# Altium PCB FYP.PcbDoc
Units mm, origin at the board's own origin, x right, y up, seen from the top; angles counter-clockwise.
Board outline 80 x 72.5 mm, 2 copper layers (Top Layer, Bottom Layer), stack 1.1 mm thick; 17 components, 28 nets, 99 pads, 9 vias.
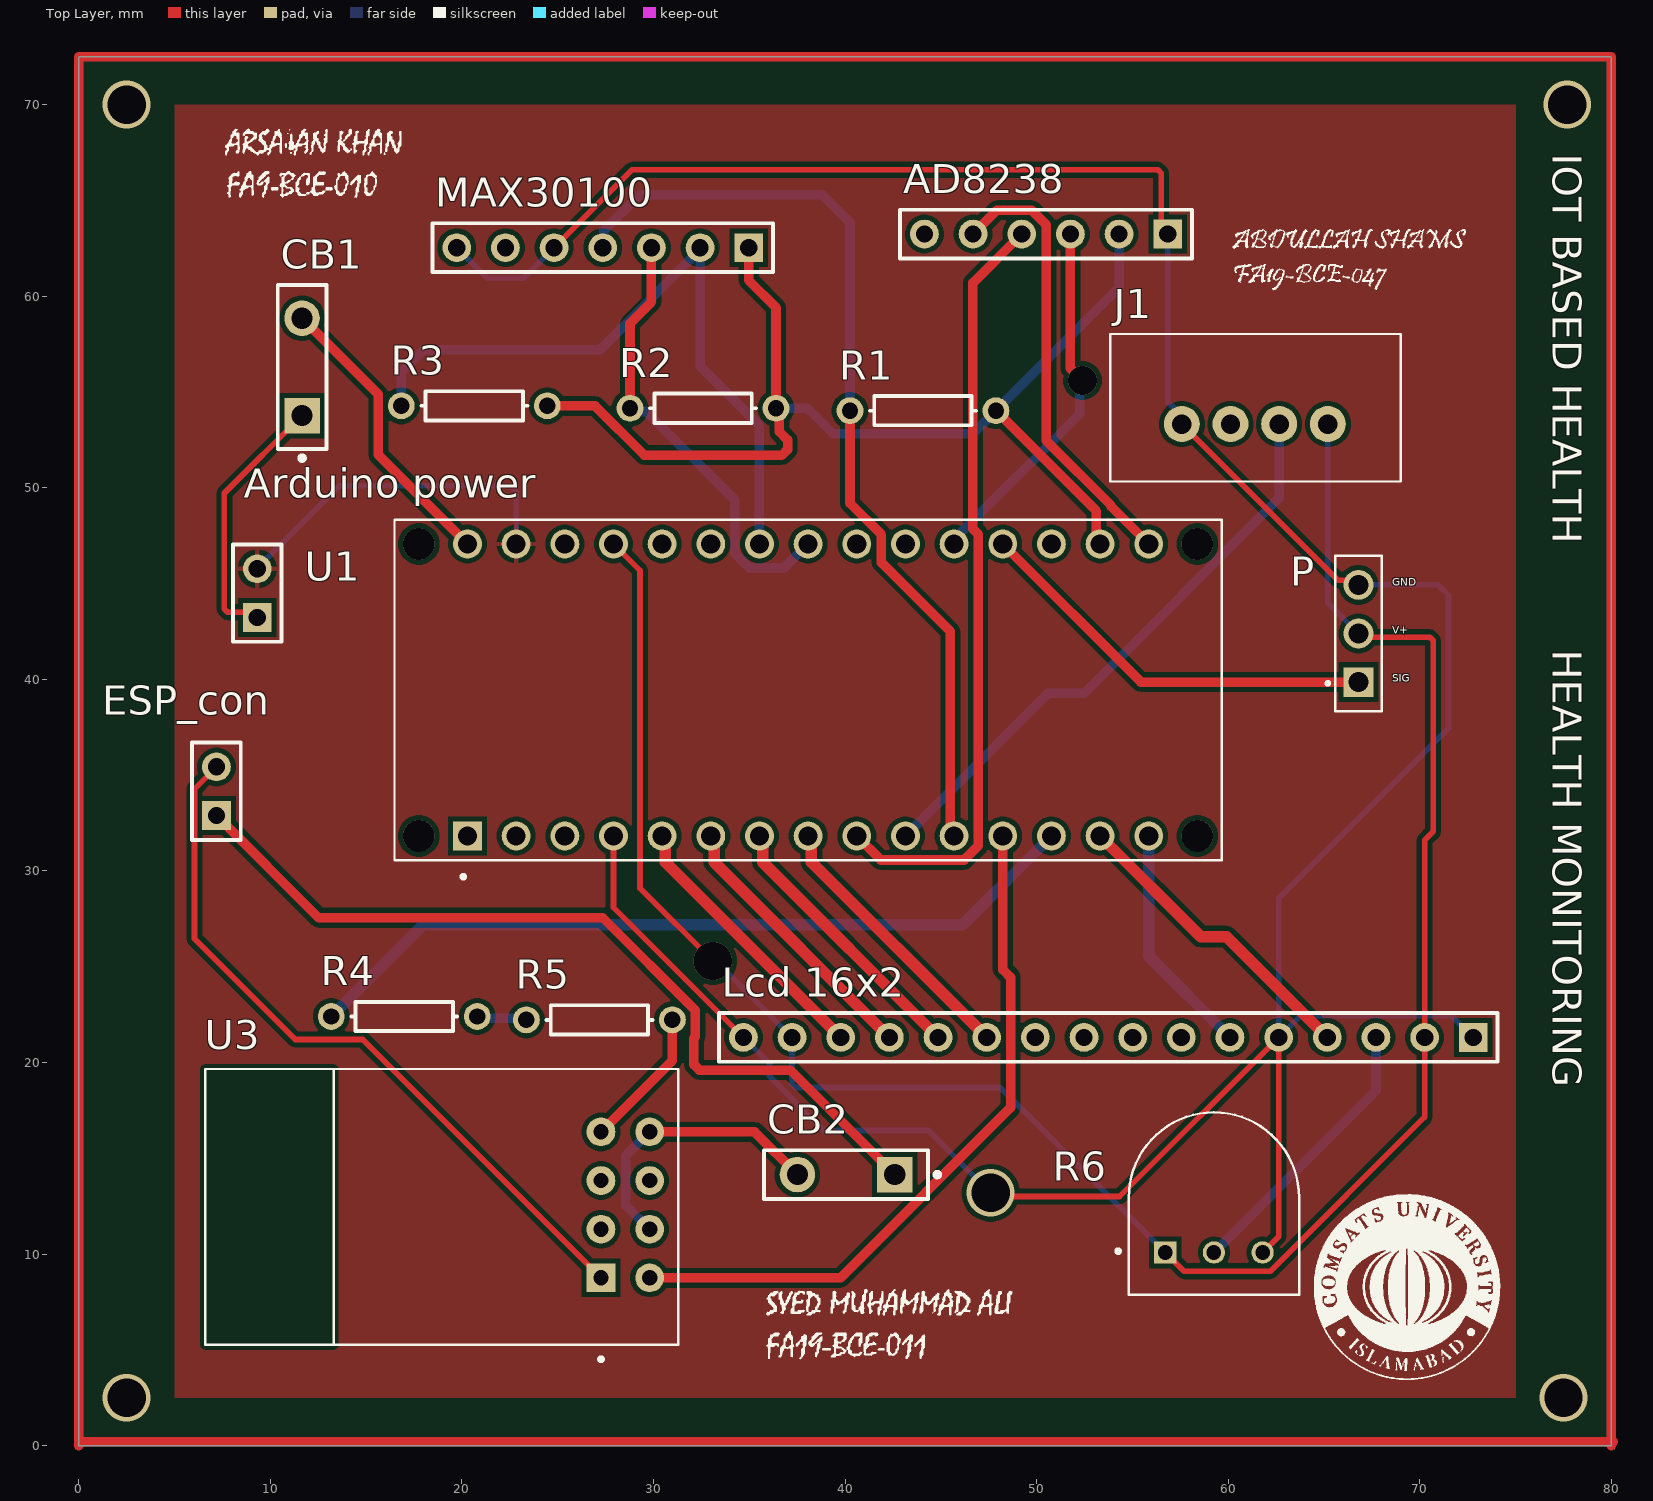
[diagram p0: Top Layer view]
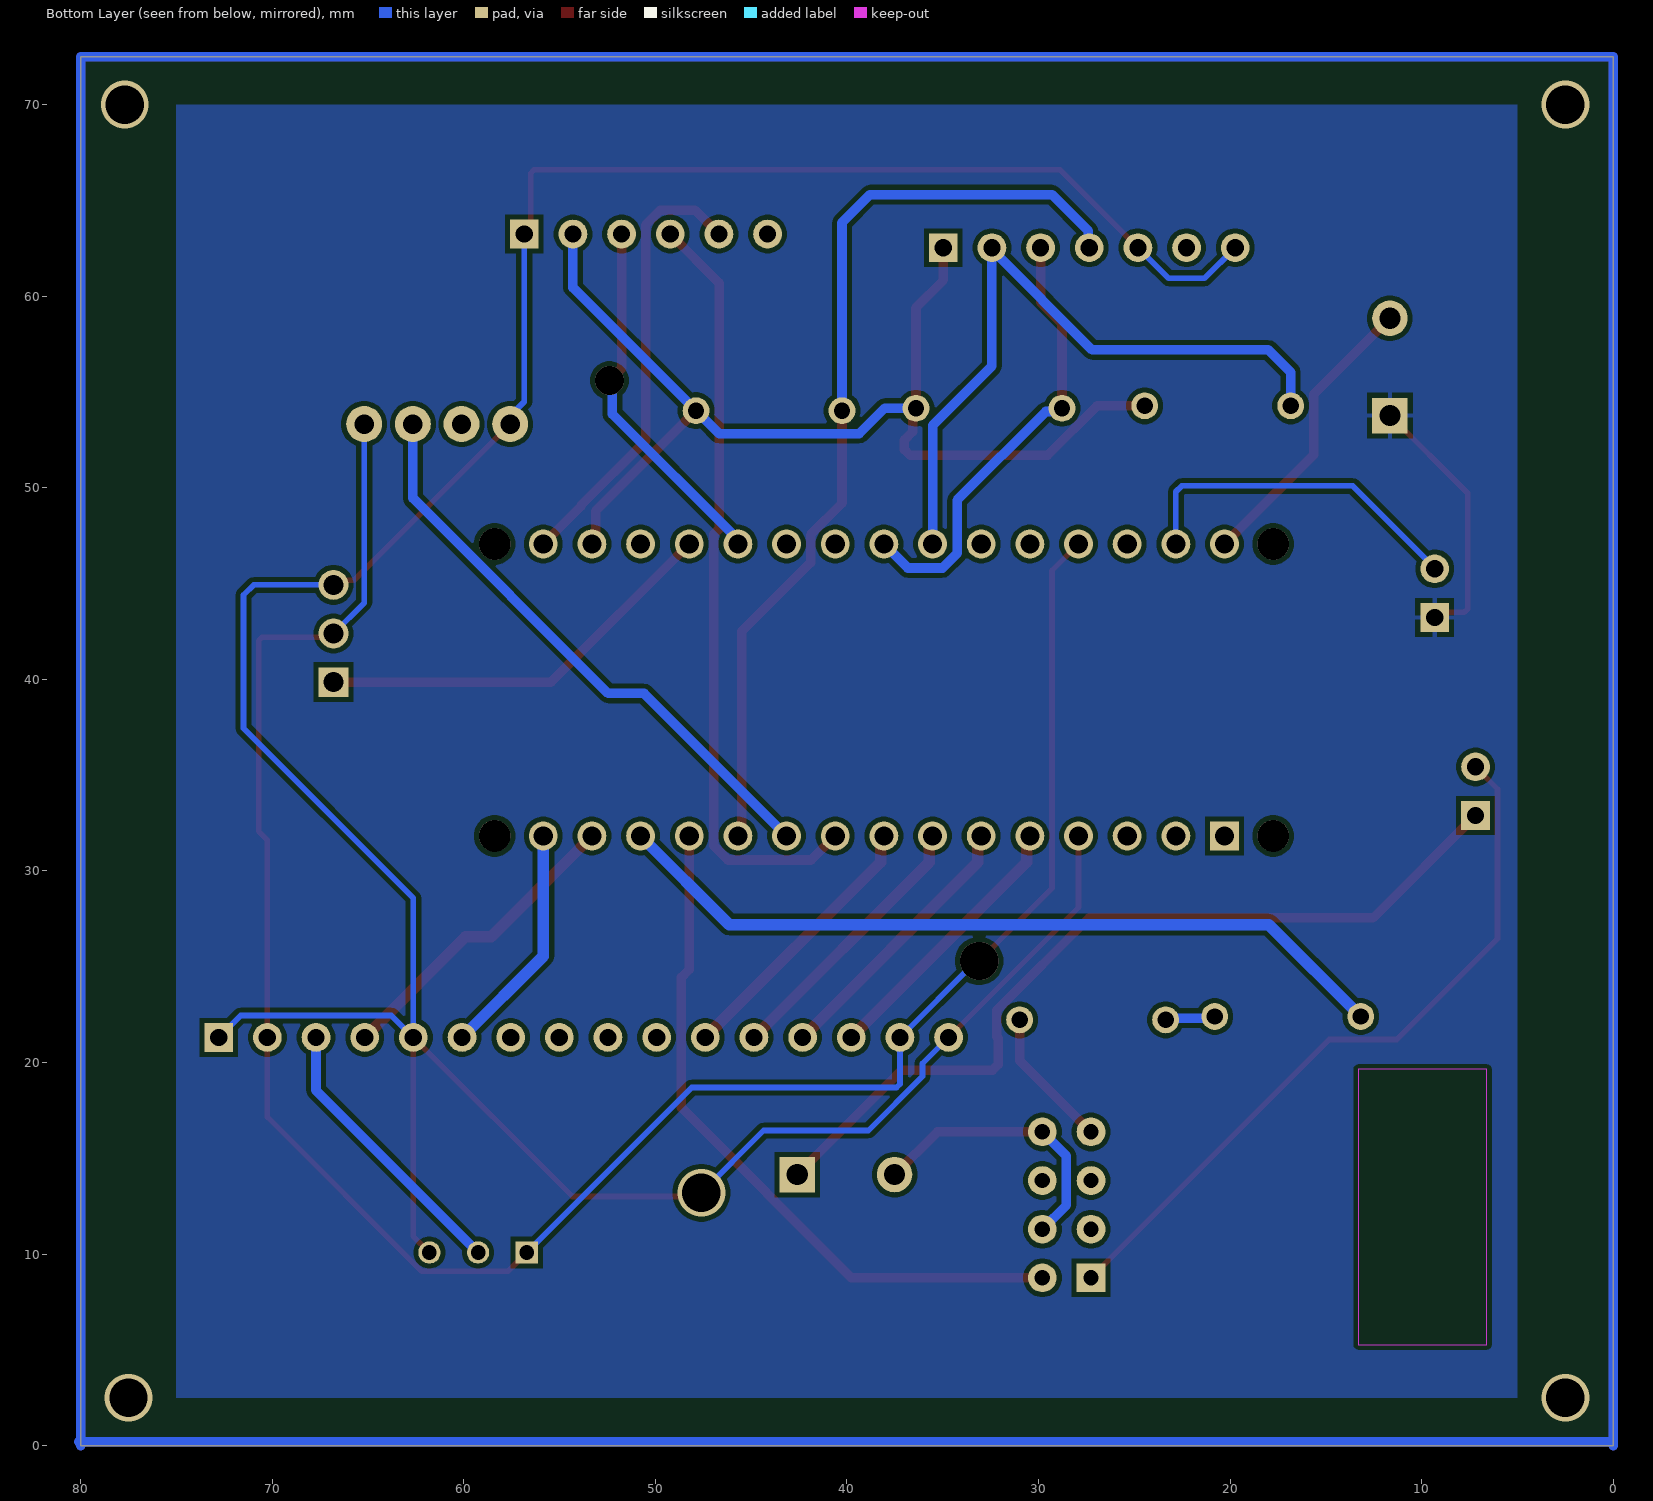
[diagram p1: Bottom Layer view, seen from below]

## Layer stack, top to bottom
Top Solder: solder mask 0.05, Solder Resist, Dk 3.5
Top Layer: signal copper 0.1
Dielectric 1: dielectric 0.9, FR-4, Dk 4.8
Bottom Layer: signal copper 0.1
Bottom Solder: solder mask 0.05, Solder Resist, Dk 3.5

## Board outline
0,0 80,0 80,72.5 0,72.5

## Design rules (kind name [scope] priority, off if disabled: settings)
Clearance [All] p1: gap=0.25 ignorepadtopadclearanceinfootprint=FALSE
PolygonConnect [All] p1: connectstyle=Relief reliefconductorwidth=0.254 reliefentries=4 polygonreliefangle="90 Angle" airgapwidth=0.254
RoutingVias [All] p1: holewidth=0.4 width=0.5 viastyle="Through Hole" minholewidth=0.4 minwidth=0.5 maxholewidth=0.4 maxwidth=0.5
SilkToSolderMaskClearance [IsPad] p1: minsilkscreentomaskgap=0.24 clearancetoexposedcopper=TRUE
SolderMaskExpansion [All] p1: expansion=0.102 istentingtop=FALSE
Width Ard_Pow [(InNet('Arduino Vcc') OR InNet('Ard Gnd') OR InNet('Esp Gnd') OR InNet('Vcc') OR InNet('gnd'))] p1: maxlimit=0.3 minlimit=0.2 preferedwidth=0.3
Width [All] p2: maxlimit=0.6 minlimit=0.2 preferedwidth=0.5
29 further rules are at their usual default settings.

## Components (designator, comment, footprint, x,y, rotation, side; value= is the part's Value field where it differs from the comment)
AD8238 "Header 6" HDR1X6 56.843,63.246 r180 top
"Arduino power" "Header 2" HDR1X2 9.32,43.23 r90 top
CB1 "Circuit Breaker" SPST-2 11.657,56.311 r90 top
CB2 "Circuit Breaker" SPST-2 40.054,14.147 r180 top
ESP_con "Header 2" HDR1X2 7.186,32.893 r90 top
J1 "DHT22" DHT22 61.39,54.178 r180 top
"Lcd 16x2" "Header 16" HDR1X16 72.794,21.31 r180 top
MAX30100 "Header 7" HDR1X7 34.974,62.534 r180 top
P "SEN-11574" XDCR_SEN-11574 66.8,42.392 r0 top
R1 "Res1" AXIAL-0.3 44.067,54.025 r0 top value=4.7K
R2 "Res1" AXIAL-0.3 32.586,54.152 r0 top value=4.7K
R3 "Res1" AXIAL-0.3 20.648,54.279 r0 top value=4.7K
R4 "Res1" AXIAL-0.3 16.991,22.402 r180 top value=1K
R5 "Res1" AXIAL-0.3 27.176,22.225 r180 top value=2.2K
R6 "3352T-1-254LF" TRIM_3352T-1-254LF 59.256,12.953 r0 top
U1 "A000005" MODULE_A000005 38.073,39.446 r90 top
U3 "ESP8266-01/ESP-01" XCVR_ESP8266-01/ESP-01 18.95,12.57 r90 top

## Footprints (in the part's own frame and the unit in brackets; to place one, negate y for a bottom-side part, rotate by r counter-clockwise, add the part's x,y. Pads: shape width x height; smd on the part's side, far side on the other; paste and mask are expansions set on the pad)
AXIAL-0.3 [mm] "Axial Device, Thru-Hole; 2 Leads; 0.3 in Pin Spacing"
  round 1.4 hole 0.85: 1(-3.81,0) 2(3.81,0)
  silkscreen extent -2.77,-0.76 2.77,0.76
DHT22 [mil]
  round 74 hole 40: DATA(-50,33.46) GND(150,33.46) NC(50,33.46) VCC(-150,33.46)
  silkscreen extent -300,-152 297,152
HDR1X2 [mm] "Connector; Header; 2 Position"
  rect 1.5x1.5 hole 0.9: 1(0,0)
  round 1.5 hole 0.9: 2(2.54,0)
  silkscreen extent -1.27,-1.27 3.81,1.27
HDR1X6 [mm] "Connector; Header; 6 Position"
  rect 1.5x1.5 hole 0.9: 1(0,0)
  round 1.5 hole 0.9: 2(2.54,0) 3(5.08,0) 4(7.62,0) 5(10.16,0) 6(12.7,0)
  silkscreen extent -1.27,-1.27 13.97,1.27
HDR1X7 [mm] "Connector; Header; 7 Position"
  rect 1.5x1.5 hole 0.9: 1(0,0)
  round 1.5 hole 0.9: 2(2.54,0) 3(5.08,0) 4(7.62,0) 5(10.16,0) 6(12.7,0) 7(15.24,0)
  silkscreen extent -1.27,-1.27 16.51,1.27
HDR1X16 [mm] "Connector; Header; 16 Position"
  rect 1.5x1.5 hole 0.9: 1(0,0)
  round 1.5 hole 0.9: 2(2.54,0) 3(5.08,0) 4(7.62,0) 5(10.16,0) 6(12.7,0) 7(15.24,0) 8(17.78,0) 9(20.32,0) 10(22.86,0) 11(25.4,0) 12(27.94,0) 13(30.48,0) 14(33.02,0) 15(35.56,0) 16(38.1,0)
  silkscreen extent -1.27,-1.27 39.37,1.27
MODULE_A000005 [mm]
  rect 1.508x1.508 / inner round 1.508 / far side rect 1.508x1.508 hole 1: 1(-7.62,17.78)
  round 1.508 hole 1: 2(-7.62,15.24) 3(-7.62,12.7) 4(-7.62,10.16) 5(-7.62,7.62) 6(-7.62,5.08) 7(-7.62,2.54) 8(-7.62,0) 9(-7.62,-2.54) 10(-7.62,-5.08) 11(-7.62,-7.62) 12(-7.62,-10.16) 13(-7.62,-12.7) 14(-7.62,-15.24) 15(-7.62,-17.78) 16(7.62,-17.78) 17(7.62,-15.24) 18(7.62,-12.7) 19(7.62,-10.16) 20(7.62,-7.62) 21(7.62,-5.08) 22(7.62,-2.54) 23(7.62,0) 24(7.62,2.54) 25(7.62,5.08) 26(7.62,7.62) 27(7.62,10.16) 28(7.62,12.7) 29(7.62,15.24) 30(7.62,17.78)
  round 1.651 hole 1.651 unplated: ""(-7.62,20.32) ""(-7.62,-20.32) ""(7.62,20.32) ""(7.62,-20.32)
  silkscreen extent -9.85,-21.59 8.89,21.59, body extent -9,-21.6 9,23.4, height 12.6
SPST-2 [mm] "Switch; 2 Leads"
  rect 1.85x1.85 hole 1.1: 1(-2.54,0)
  round 1.85 hole 1.1: 2(2.54,0)
  silkscreen extent -4.89,-1.27 4.28,1.27
TRIM_3352T-1-254LF [mm]
  rect 1.16x1.16 hole 0.76: 1(-2.54,-2.87)
  round 1.16 hole 0.76: 2(0,-2.87) 3(2.54,-2.87)
  silkscreen extent -5.1,-5.08 4.44,4.44, body extent -4.44,-5.08 4.44,4.44, height 4.32
XCVR_ESP8266-01/ESP-01 [mm]
  rect 1.5x1.5 hole 0.8: 1(-3.81,-8.31)
  round 1.5 hole 0.8: 2(-1.27,-8.31) 3(1.27,-8.31) 4(3.81,-8.31) 5(-3.81,-10.85) 6(-1.27,-10.85) 7(1.27,-10.85) 8(3.81,-10.85)
  Keep-Out Layer region: 7.09,5.65 -7.31,5.65 -7.31,12.35 7.09,12.35
  silkscreen extent -8.16,-12.35 7.09,12.35
XDCR_SEN-11574 [mm]
  rect 1.56x1.56 hole 1.04: 1(0,-2.54)
  round 1.56 hole 1.04: 2(0,0) 3(0,2.54)
  silkscreen extent -1.7,-4.07 1.2,4.07

## Part data
AD8238: "Header, 6-Pin", LatestRevisionDate=17-Jul-2002, LatestRevisionNote="Re-released for DXP Platform.", Publisher="Altium Limited"
"Arduino power" ESP_con: "Header, 2-Pin", LatestRevisionDate=17-Jul-2002, LatestRevisionNote="Re-released for DXP Platform.", Publisher="Altium Limited"
J1: "Capacitive-type humidity and temperature module/sensor", Package=Package, Availability=Unavailable, Check_prices=https://www.snapeda.com/parts/DHT22/Aosong%20Electronics/view-part/5164503/?ref=eda, MF="Aosong Electronics", MP=DHT22, Price=None, SnapEDA_Link=https://www.snapeda.com/parts/DHT22/Aosong%20Electronics/view-part/5164503/?ref=snap
"Lcd 16x2": "Header, 16-Pin", LatestRevisionDate=17-Jul-2002, LatestRevisionNote="Re-released for DXP Platform.", Publisher="Altium Limited"
MAX30100: "Header, 7-Pin", LatestRevisionDate=17-Jul-2002, LatestRevisionNote="Re-released for DXP Platform.", Publisher="Altium Limited"
P: "PULSE SENSOR FOR ARDUINO", Package=None, Availability=Unavailable, MF=SparkFun, MP=SEN-11574, Price=None, SnapEDA_Link=https://www.snapeda.com/parts/SEN-11574/SparkFun%20Electronics/view-part/1269548/?ref=snap
R1 R2 R3 R4 R5: "Resistor", LatestRevisionDate=17-Jul-2002, LatestRevisionNote="Re-released for DXP Platform.", PackageDescription="Axial Device, Thru-Hole; 2 Leads; 0.3 in Pin Spacing", PackageReference=AXIAL-0.3, Published=8-Jun-2000, Publisher="Altium Limited"
R6: "RESISTOR, VARIABLE, 250KOHM, 0.5W, Â±20%; Track Resistance:250kohm; No. of Turns:1; Resistance Tolerance:Â± 20%; Temperature Coefficient:Â± 100ppm/Â°C; Power Rating:500mW; Potentiometer Mounting:Through Hole ;RoHS Compliant: Yes", Package="3352T-3 Bourns", Availability="In Stock", Check_prices=https://www.snapeda.com/parts/3352T-1-254LF/Bourns/view-part/?ref=eda, MF=Bourns, MP=3352T-1-254LF, Price=None, Purchase-URL=https://pricing.snapeda.com/search/part/3352T-1-254LF/?ref=eda, SnapEDA_Link=https://www.snapeda.com/parts/3352T-1-254LF/Bourns/view-part/?ref=snap
U1: "Small, complete, and breadboard-friendly board based on the ATmega328 (Arduino Nano 3.x).", Package="Non-Standard Arduino", Availability="In Stock", Check_prices=https://www.snapeda.com/parts/A000005/Arduino/view-part/?ref=eda, MF=Arduino, MP=A000005, Price=None, Purchase-URL=https://pricing.snapeda.com/search/part/A000005/?ref=eda, SnapEDA_Link=https://www.snapeda.com/parts/A000005/Arduino/view-part/?ref=snap
U3: "MakerFocus 4pcs ESP8266 ESP-01 Serial Wireless WiFi Transceiver Receiver Module 1MB SPI Flash DC3.0-3.6V Internet of Things WiFi Module Board Compatible with Ar duino", Package=None, Availability=Unavailable, MP=ESP8266-01/ESP-01, Price=None
CB1 CB2: LatestRevisionDate=17-Jul-2002, LatestRevisionNote="Re-released for DXP Platform.", PackageDescription="Switch; 2 Leads", PackageReference=SPST-2, Published=24-Mar-1999, Publisher="Altium Limited"

## Via types
v1: diameter 2.5, hole 2, Top Layer to Bottom Layer, 7 vias
v2: diameter 2, hole 2, Top Layer to Bottom Layer, 1 vias
v3: diameter 1.5, hole 1.5, Top Layer to Bottom Layer, 1 vias

## Nets (pads, with @x,y where several pads share a name; then routed paths per layer and width w, separated by ;. In a path a pad name is that pad's centre, name@x,y a point inside that pad or via, vN(x,y) a via of type N, cw(c..) or ccw(c..) an arc to the next point about the centre after c; other vN are vias at no path point)
"Ard Gnd": "Arduino power.2" U1.29 | length 18.2
  Bottom Layer w0.3: 9.32,45.77 9.32,45.82 13.6,50.1 22.524,50.1 22.833,49.792 U1.29
"Arduino Vcc": "Arduino power.1" CB1.1 | length 13.7
  Top Layer w0.3: 9.32,43.23 9.05,43.5 7.776,43.5 7.6,43.676 7.6,49.715 CB1.1
"Esp Gnd": ESP_con.2 U3.1 | length 38
  Top Layer w0.3: ESP_con.2 6.036,34.283 6.036,26.464 11.3,21.2 14.82,21.2 U3.1
gnd: "Lcd 16x2.1" "Lcd 16x2.5" "Lcd 16x2.16" AD8238.1 J1.GND MAX30100.5 MAX30100.7 P.3 R6.3 U1.4 | length 168.4
  Top Layer w0.3: MAX30100.5 28.879,66.6 56.324,66.6 56.5,66.424 56.5,63.589 AD8238.1 ; U1.4 27.913,28.092 34.694,21.31 ; v1@48.1,13 54.324,13 62.634,21.31 62.634,10.922 R6.3 ; J1.GND 65.734,45.173 66.559,45.173 P.3
  Bottom Layer w0.3: MAX30100.7 21.334,60.935 23.214,60.935 MAX30100.5 ; 34.694,21.31 36.053,19.951 36.053,19.279 38.882,16.45 44.35,16.45 v1(47.6,13.2) ; AD8238.1 56.843,54.492 57.58,53.755 J1.GND ; P.3 70.968,44.932 71.5,44.4 71.5,37.45 62.634,28.585 62.634,21.31 63.784,22.46 71.644,22.46 72.794,21.31
NetAD8238_2: AD8238.2 MAX30100.1 R1.2 R2.2 R3.2 U1.17 | length 58.7
  Top Layer w0.5: R3.2 26.952,54.279 29.532,51.7 36.707,51.7 37,51.993 37,52.493 36.568,52.924 36.568,53.98 R2.2 36.396,59.404 34.974,60.826 MAX30100.1 ; R1.2 53.12,48.783 53.12,47.259 U1.17
  Bottom Layer w0.5: R2.2 38.033,54.152 39.36,52.825 46.677,52.825 R1.2 54.303,60.452 AD8238.2
NetAD8238_3: AD8238.3 U1.20 | length 18.7
  Top Layer w0.5: AD8238.3 51.763,56.237 v3@52,56
  Bottom Layer w0.5: U1.20 45.693,47.293 52.25,53.85 52.25,55.45 v3(52.4,55.6)
NetAD8238_4: AD8238.4 U1.9 | length 40.3
  Top Layer w0.5: U1.9 41.867,30.572 46.212,30.572 46.947,31.306 46.947,47.585 46.677,47.855 46.677,60.699 AD8238.4
NetAD8238_5: AD8238.5 U1.16 | length 23.5
  Top Layer w0.5: AD8238.5 47.933,64.496 49.741,64.496 50.513,63.723 50.513,52.45 53.87,49.093 53.87,49.049 U1.16
NetCB1_2: CB1.2 U1.30 | length 15.9
  Top Layer w0.5: CB1.2 11.657,59.057 11.7,59.1 11.7,58.808 15.638,54.87 15.638,51.72 U1.30
NetCB2_1: CB2.1 ESP_con.1 | length 44.9
  Top Layer w0.5: ESP_con.1 12.522,27.557 27.351,27.557 32.186,22.722 32.186,21.347 32.107,21.268 32.107,19.893 32.4,19.6 37.141,19.6 CB2.1
NetCB2_2: CB2.2 U3.6 U3.8 | length 14.9
  Top Layer w0.5: U3.8 29.8,16.5 29.92,16.38 35.281,16.38 CB2.2
  Bottom Layer w0.5: U3.6 28.55,12.55 28.55,15.13 U3.8
NetJ1_DATA: J1.DATA U1.10 | length 30.7
  Bottom Layer w0.5: U1.10 50.595,39.268 52.469,39.268 62.66,49.458 J1.DATA
"NetLcd 16x2_3": "Lcd 16x2.3" R6.2 | length 14.7
  Bottom Layer w0.5: R6.2 67.714,18.542 67.714,21.31
"NetLcd 16x2_4": "Lcd 16x2.4" U1.14 | length 16.2
  Top Layer w0.6: U1.14 58.571,26.567 59.917,26.567 65.174,21.31
"NetLcd 16x2_6": "Lcd 16x2.6" U1.15 | length 12.3
  Bottom Layer w0.6: U1.15 55.853,25.552 60.094,21.31
"NetLcd 16x2_11": "Lcd 16x2.11" U1.8 | length 14.6
  Top Layer w0.6: U1.8 38.246,31.652 38.246,30.458 47.105,21.6 47.4,21.6 47.394,21.594 47.394,21.31
"NetLcd 16x2_12": "Lcd 16x2.12" U1.7 | length 14.4
  Top Layer w0.6: U1.7 35.706,31.652 35.706,30.458 44.854,21.31 44.854,21.246
"NetLcd 16x2_13": "Lcd 16x2.13" U1.6 | length 14.4
  Top Layer w0.6: U1.6 33.166,31.652 33.166,30.458 42.314,21.31
"NetLcd 16x2_14": "Lcd 16x2.14" U1.5 | length 14.4
  Top Layer w0.6: U1.5 30.626,31.652 30.626,30.458 39.685,21.4 39.7,21.4 39.774,21.326 39.774,21.31
NetMAX30100_2: MAX30100.2 R3.1 U1.24 | length 36.9
  Bottom Layer w0.5: R3.1 16.838,56.038 18,57.2 27.2,57.2 MAX30100.2@32.434,62.434 ; MAX30100.2 MAX30100.2@32.434,62.434 ; U1.24 35.533,47.167 35.4,47.3 35.533,47.433 35.533,53.252 32.434,56.351 MAX30100.2@32.434,62.434
NetMAX30100_3: MAX30100.3 R2.1 U1.23 | length 23.7
  Top Layer w0.5: R2.1 28.776,58.576 29.894,59.694 MAX30100.3
  Bottom Layer w0.5: R2.1 28.948,53.98 29.62,53.98 34.247,49.353 34.247,46.578 35.013,45.812 36.819,45.812 U1.23
NetMAX30100_4: MAX30100.4 R1.1 U1.11 | length 49.5
  Top Layer w0.5: R1.1 40.257,49.195 41.899,47.553 41.899,46.101 45.5,42.5 45.5,32.085 45.759,31.826 U1.11
  Bottom Layer w0.5: MAX30100.4 27.4,62.581 27.4,63.407 29.293,65.3 38.8,65.3 40.257,63.843 R1.1
NetP_1: P.1 U1.19 | length 21.6
  Top Layer w0.5: U1.19 55.446,39.852 P.1
NetR4_1: R4.1 R5.2 | length 2.6
  Bottom Layer w0.5: R4.1 20.89,22.314 23.277,22.314 R5.2
NetR4_2: R4.2 U1.13 | length 41.5
  Bottom Layer w0.6: R4.2 17.976,27.197 46.144,27.197 U1.13
NetR5_1: R5.1 U3.4 | length 7.4
  Top Layer w0.5: U3.4 30.986,20.106 R5.1
NetU1_12: U1.12 U3.5 | length 37
  Top Layer w0.5: U3.5 39.764,8.76 48.644,17.641 48.644,24.443 48.233,24.855 48.233,31.467 48.1,31.6 48.233,31.733 U1.12
Vcc: "Lcd 16x2.2" "Lcd 16x2.15" J1.VCC P.2 R6.1 U1.27 | length 113.1
  Top Layer w0.3: U1.27 29.299,45.68 29.299,29.101 v2(33.1,25.3) ; R6.1 57.696,9.103 62.202,9.103 70.254,17.156 70.254,21.31 70.254,31.607 70.7,32.052 70.7,42.024 70.524,42.2 66.992,42.2 P.2
  Bottom Layer w0.3: v2@33.3,25.3 33.3,25.245 37.234,21.31 37.234,18.876 37.41,18.7 48.1,18.7 R6.1 ; J1.VCC 65.2,43.992 P.2
pads on no net: "Lcd 16x2.7" "Lcd 16x2.8" "Lcd 16x2.9" "Lcd 16x2.10" AD8238.6 J1.NC MAX30100.6 U1. U1.1 U1.2 U1.3 U1.18 U1.21 U1.22 U1.25 U1.26 U1.28 U3.2 U3.3 U3.7
copper on no net: | length 610
  Top Layer w0.5: 0,0 0,72.5 80,72.5 80,0 ; 0.1,0.2 80.1,0.2
  Bottom Layer w0.5: 0,0 0,72.5 80,72.5 80,0 ; 0.1,0.2 80.1,0.2
  other v1: 2.5,2.5 77.5,2.5 2.5,70 77.7,70 77.7,70 77.7,70

## Polygon pours and split planes (outlines as drawn)
"Arduino Vcc" on Bottom Layer "ARDUINO_VCC_L02_P000" (solid, remove dead copper, pour order 0): 5,70 5,2.5 75,2.5 75,70
"Ard Gnd" on Top Layer "ARD_GND_L01_P001" (solid, remove dead copper, pour order 1): 5,2.5 75,2.5 75,70 5,70

## Silkscreen, mask and mechanical layers (free items; w line width, h text height)
Top Overlay:
  drawing of 112 lines, arcs and shapes, not listed
  text "IOT BASED HEALTH" at 76.954,67.446 h1.52 r270
  text "HEALTH MONITORING" at 76.954,41.546 h1.52 r270

## Text inside footprints (layer, text, board x,y; h text height)
P: Top Overlay "GND" at 68.554,44.897 h0.41; Top Overlay "V+" at 68.556,42.392 h0.41; Top Overlay "SIG" at 68.555,39.885 h0.41